# EAGLE board MotorShield (EAGLE 9.2.2)
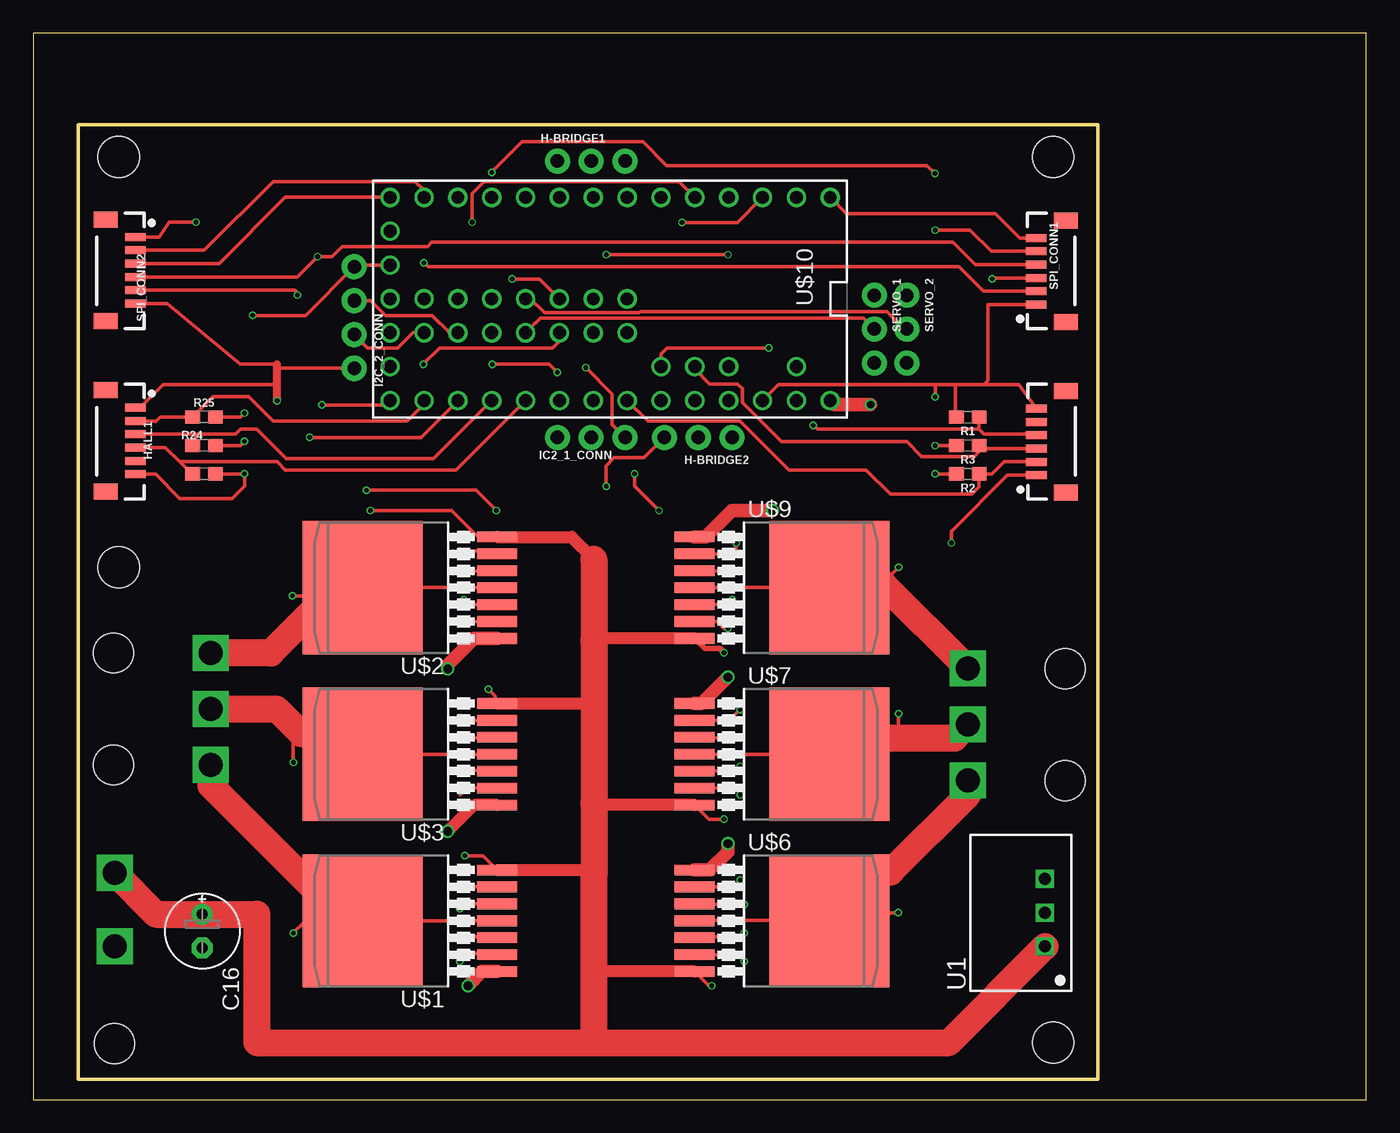
[diagram p0: board, top side]
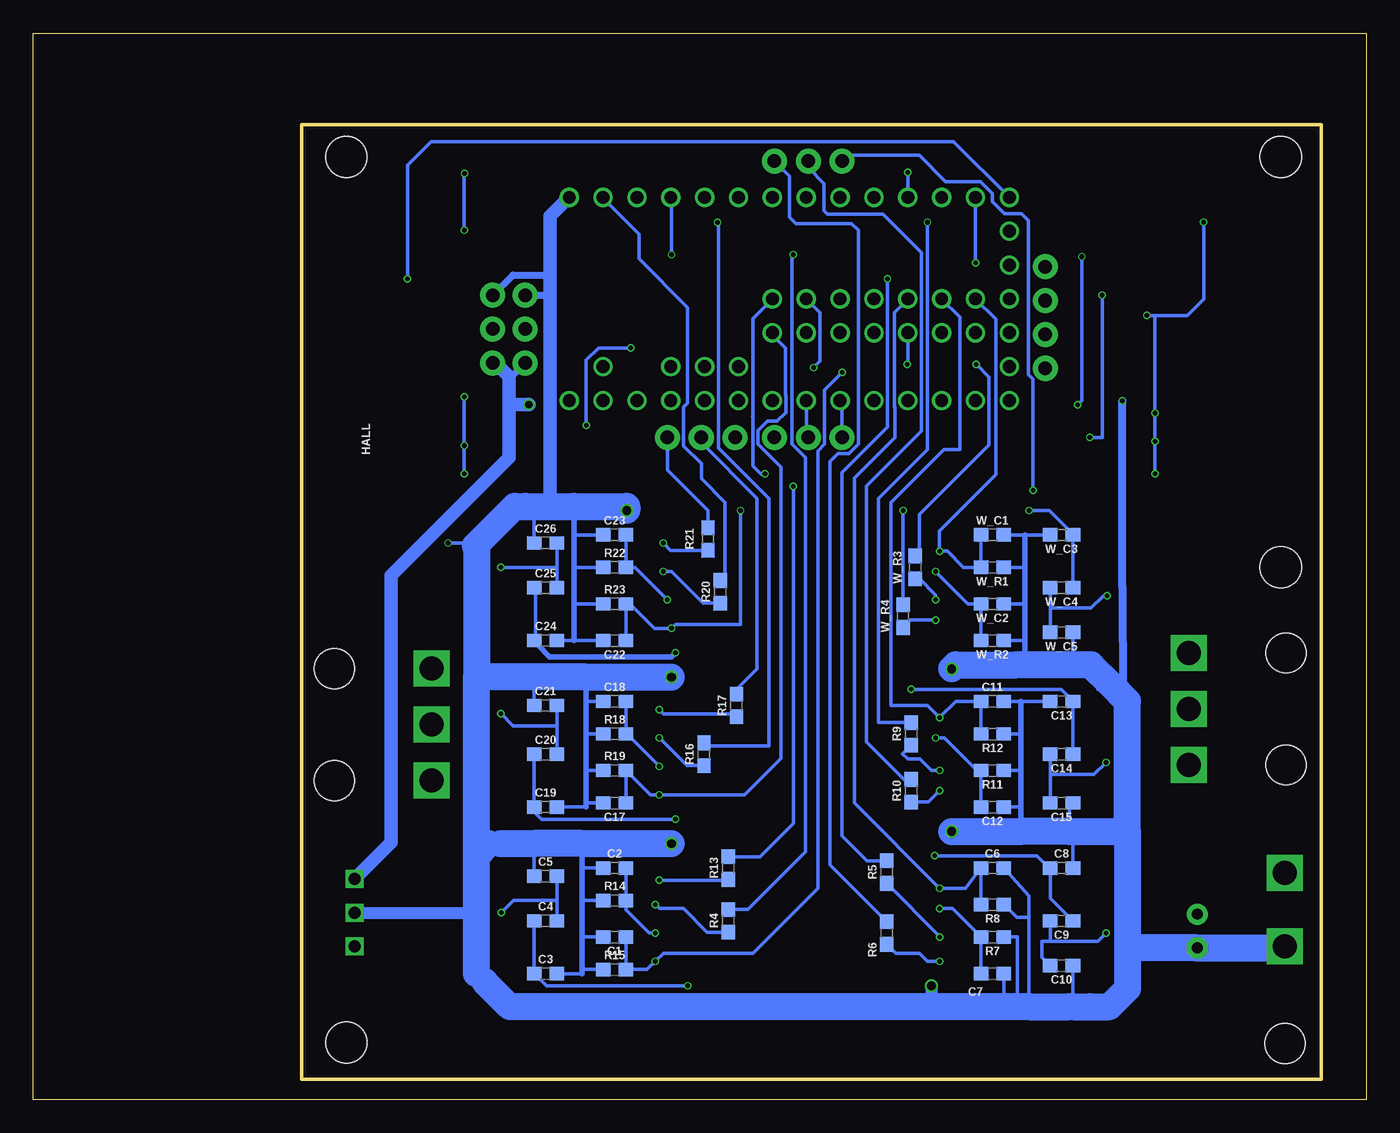
[diagram p1: board, bottom side, seen from below]

Size 100 x 80 mm. Coordinates in mm from the lower left corner, seen from the top.
Outline: 0,0 100,0 100,80 0,80 0,0
Outline: 3.35,1.52 79.86,1.52 79.86,73.15 3.35,73.15 3.35,1.52
Copper layers (1*16): Top 0.018mm / dielectric 1.55mm / Bottom 0.018mm
Design rules "Multi-CB_2L_100æm-Tracks_OL35æm": minimum track width 0.1mm, minimum drill 0.2mm, track to track 0.1mm, track to pad 0.1mm, pad to pad 0.1mm, via to via 0.1mm, smd to smd 0mil, copper to edge 0.2mm, drill to drill 0.2mm, minimum pad ring 0.125mm, minimum via ring 0.1mm, stop-mask expansion 2mil, vias tented up to drill 0.45mm, thermal gap 0.2mm
Holes 3.1 mm at 6.4,70.71 76.5,70.71 76.5,4.27 6.4,39.93

## Footprints (pad centres in the part's own frame; a part is rotated, then mirrored left to right if it is on the bottom)
0603 = smd 1.1 x 1: 1 -0.85,0; 2 0.85,0
E2,5-6E = drill 0.813 pad 1.575: + -1.27,0 | drill 0.813 pad 1.575 octagon: - 1.27,0
1X03_NO_SILK = drill 1.016 pad 1.88: 1 0,0; 2 2.54,0; 3 5.08,0
1X06-1MM = smd 0.6 x 1.55: 1 -2.54,1.27; 2 -1.54,1.27; 3 -0.54,1.27; 4 0.46,1.27; 5 1.46,1.27; 6 2.46,1.27 | smd 1.2 x 1.8: P$1 -3.84,-0.955; P$2 3.76,-0.955
1X04_NO_SILK = drill 1.016 pad 1.88: 1 0,0; 2 2.54,0; 3 5.08,0; 4 7.62,0
TSR-1 = drill 0.9 square: 1 -2.54,0; 2 0,0; 3 2.54,0
P-TO263-7-1 = smd 0.8 x 3: 1 -3.81,-9.207; 2 -2.54,-9.207; 3 -1.27,-9.207; 4 0,-9.207; 5 1.27,-9.207; 6 2.54,-9.207; 7 3.81,-9.207 | smd 10 x 9: 8 0,0.895
5569-003 = drill 1.8 square: U -4.2,3.65; V 0,3.65; W 4.2,3.65 | hole 3: 4.2,-3.65; -4.2,-3.65
5569-002 = drill 1.8 square: GND 0,0; VCC 0,5.5 | hole 3: 0,-7.3
TEENSY_3.0-3.2_ALL_PINS_&_PADS = drill 0.965: 0 -7.62,13.97; 1 -7.62,11.43; 2 -7.62,8.89; 3 -7.62,6.35; 3.3V 7.62,11.43; 3.3V1 -2.54,-16.51; 3.3V2 2.54,-1.27; 4 -7.62,3.81; 5 -7.62,1.27; 6 -7.62,-1.27; 7 -7.62,-3.81; 8 -7.62,-6.35; 9 -7.62,-8.89; 10 -7.62,-11.43; 11 -7.62,-13.97; 12 -7.62,-16.51; 13 7.62,-16.51; 14/A0 7.62,-13.97; 15/A1 7.62,-11.43; 16/A2 7.62,-8.89; 17/A3 7.62,-6.35; 18/A4 7.62,-3.81; 19/A5 7.62,-1.27; 20/A6 7.62,1.27; 21/A7 7.62,3.81; 22/A8 7.62,6.35; 23/A9 7.62,8.89; 24 0,-3.81; 25 0,-6.35; 26 0,-8.89; 27 0,-11.43; 28 0,-13.97; 29 2.54,-13.97; 30 2.54,-11.43; 31 2.54,-8.89; 32 2.54,-6.35; 33 2.54,-3.81; A10 5.08,6.35; A11 5.08,3.81; A12 0,1.27; A13 2.54,1.27; AGND 7.62,13.97; AREF 5.08,8.89; GND -7.62,16.51; GND1 0,-16.51; GND2 0,-1.27; PGM 2.54,-16.51; RESET/DAC 5.08,-16.51; VBAT -5.08,-16.51; VIN 7.62,16.51; VUSB 5.08,13.97

## Placement (x,y rotation side)
C1  0.1uF  [0603]  56.39,12.19 180 bottom
C2  1nF  [0603]  56.39,17.37 0 bottom
C3  0.1uF  [0603]  61.57,9.45 0 bottom
C4  0.22uF  [0603]  61.57,13.41 0 bottom
C5  0.22uF  [0603]  61.57,16.76 0 bottom
C6  0.1uF  [0603]  28.04,17.37 0 bottom
C7  1nF  [0603]  28.04,9.45 180 bottom
C8  0.1uF  [0603]  22.86,17.37 0 bottom
C9  0.22uF  [0603]  22.86,13.41 180 bottom
C10  0.22uF  [0603]  22.86,10.06 180 bottom
C11  0.1uF  [0603]  28.04,29.87 0 bottom
C12  1nF  [0603]  28.04,21.95 180 bottom
C13  0.1uF  [0603]  22.86,29.87 180 bottom
C14  0.22uF  [0603]  22.86,25.91 180 bottom
C15  0.22uF  [0603]  22.86,22.25 180 bottom
C16  [E2,5-6E]  12.67,12.64 270 top
C17  0.1uF  [0603]  56.39,22.25 180 bottom
C18  1nF  [0603]  56.39,29.87 0 bottom
C19  0.1uF  [0603]  61.57,21.95 0 bottom
C20  0.22uF  [0603]  61.57,25.91 0 bottom
C21  0.22uF  [0603]  61.57,29.57 0 bottom
C22  0.1uF  [0603]  56.39,34.44 180 bottom
C23  1nF  [0603]  56.39,42.37 0 bottom
C24  0.1uF  [0603]  61.57,34.44 0 bottom
C25  0.22uF  [0603]  61.57,38.4 0 bottom
C26  0.22uF  [0603]  61.57,41.76 0 bottom
H-BRIDGE1  PWM  [1X03_NO_SILK]  39.32,70.41 0 top
H-BRIDGE2  PWM  [1X03_NO_SILK]  52.43,49.68 180 top
HALL  [1X06-1MM]  76.53,49.38 90 top
HALL1  [1X06-1MM]  6.4,49.38 270 top
I2C_2_CONN  IMU_SENS  [1X04_NO_SILK]  24.08,54.86 90 top
IC2_1_CONN  INTEL_BRD  [1X03_NO_SILK]  39.32,49.68 0 top
R1  10k  [0603]  70.1,51.21 180 top
R2  10k  [0603]  70.1,46.94 180 top
R3  10k  [0603]  70.1,49.07 180 top
R4  10k  [0603]  47.85,13.41 90 bottom
R5  10k  [0603]  35.97,17.07 90 bottom
R6  10k  [0603]  35.97,12.5 90 bottom
R7  47k  [0603]  28.04,12.19 180 bottom
R8  4.7k  [0603]  28.04,14.63 180 bottom
R9  10k  [0603]  34.14,27.43 90 bottom
R10  10k  [0603]  34.14,23.16 90 bottom
R11  47k  [0603]  28.04,24.69 180 bottom
R12  4.7k  [0603]  28.04,27.43 180 bottom
R13  10k  [0603]  47.85,17.37 90 bottom
R14  47k  [0603]  56.39,14.94 0 bottom
R15  4.7k  [0603]  56.39,9.75 0 bottom
R16  10k  [0603]  49.68,25.91 90 bottom
R17  10k  [0603]  47.24,29.57 90 bottom
R18  47k  [0603]  56.39,27.43 0 bottom
R19  4.7k  [0603]  56.39,24.69 0 bottom
R20  10k  [0603]  48.46,38.1 90 bottom
R21  10k  [0603]  49.38,42.06 90 bottom
R22  47k  [0603]  56.39,39.93 0 bottom
R23  4.7k  [0603]  56.39,37.19 0 bottom
R24  10k  [0603]  12.8,46.94 0 top
R25  10k  [0603]  12.8,51.21 0 top
R26  10k  [0603]  12.8,49.07 0 top
SERVO_1  [1X03_NO_SILK]  63.09,60.35 270 top
SERVO_2  [1X03_NO_SILK]  65.53,60.35 270 top
SPI_CONN1  ENCODER  [1X06-1MM]  76.5,62.18 90 top
SPI_CONN2  ENCODER  [1X06-1MM]  6.4,62.18 270 top
U1  TSR_1-2450  [TSR-1]  75.9,14.02 90 top
U$1  [P-TO263-7-1]  25.6,13.41 90 top
U$2  [P-TO263-7-1]  25.6,38.4 90 top
U$3  [P-TO263-7-1]  25.6,25.91 90 top
U$4  [5569-003]  9.67,29.3 270 top
U$5  5569-002  [5569-002]  6.1,11.5 0 bottom
U$6  [P-TO263-7-1]  58.83,13.41 270 top
U$7  [P-TO263-7-1]  58.83,25.91 270 top
U$8  [5569-003]  73.76,28.13 90 top
U$9  [P-TO263-7-1]  58.83,38.4 270 top
U$10  TEENSY_3.1-3.2_ALL_PINS&PADS  [TEENSY_3.0-3.2_ALL_PINS_&_PADS]  43.28,60.07 270 top
W_C1  0.1uF  [0603]  28.04,42.37 0 bottom
W_C2  1nF  [0603]  28.04,37.19 180 bottom
W_C3  0.1uF  [0603]  22.86,42.37 180 bottom
W_C4  0.22uF  [0603]  22.86,38.4 180 bottom
W_C5  0.22uF  [0603]  22.86,35.05 180 bottom
W_R1  4.7k  [0603]  28.04,39.93 180 bottom
W_R2  47k  [0603]  28.04,34.44 180 bottom
W_R3  10k  [0603]  33.83,39.93 90 bottom
W_R4  10k  [0603]  34.75,36.27 90 bottom

## Library data of the parts
C1 C3 C6 C8 C11 C13 C17 C19 C22 C24 W_C1 W_C3 = SparkFun-Capacitors; PROD_ID: CAP-08604
C2 C7 C12 C18 C23 W_C2 = SparkFun-Capacitors; PROD_ID: CAP-07886
C4 C5 C9 C10 C14 C15 C20 C21 C25 C26 W_C4 W_C5 = SparkFun-Capacitors; PROD_ID: CAP-07822
C16 = rcl; SPICEPREFIX: C
H-BRIDGE1 H-BRIDGE2 IC2_1_CONN SERVO_1 SERVO_2 = SparkFun-Connectors
HALL HALL1 SPI_CONN1 SPI_CONN2 = SparkFun-Connectors; PROD_ID: CONN-08249; SF_ID: GPS-00579
I2C_2_CONN = SparkFun-Connectors; PROD_ID: CONN-09696
R1-R6 R9 R10 R13 R16 R17 R20 R21 R24-R26 W_R3 W_R4 = SparkFun-Resistors; PROD_ID: RES-00824
R7 R11 R14 R18 R22 W_R2 = SparkFun-Resistors; PROD_ID: RES-07871
R8 R12 R15 R19 R23 W_R1 = SparkFun-Resistors; PROD_ID: RES-07857
U1 = _traco_tsr-1
U$1-U$3 U$6 U$7 U$9 = ITX007T
U$4 U$8 = 5569-03
U$5 = 5569-02
U$10 = Teensy_3_and_LC_Series_Boards_v1.4

## Nets
3.3V: HALL1.6 HALL.6 I2C_2_CONN.4 R1.2 R2.2 R3.2 R24.2 R25.2 R26.2 SPI_CONN1.1 SPI_CONN2.1 U$10.3.3V U$10.3.3V1 U$10.3.3V2
AGND: U$10.AGND
AREF: U$10.AREF
CS1: SPI_CONN1.5 U$10.9
CS2: SPI_CONN2.5 U$10.15/A1
GND: C1.2 C2.1 C3.2 C5.1 C6.2 C7.1 C8.2 C10.1 C11.2 C12.1 C13.2 C15.1 C16.- C17.2 C18.1 C19.2 C21.1 C22.2 C23.1 C24.2 C26.1 HALL1.1 HALL.1 I2C_2_CONN.1 IC2_1_CONN.3 R7.1 R8.1 R11.1 R12.1 R14.1 R15.1 R18.1 R19.1 R22.1 R23.1 SERVO_1.1 SERVO_2.1 SPI_CONN1.6 SPI_CONN2.6 U1.2 U$1.1 U$2.1 U$3.1 U$5.GND U$6.1 U$7.1 U$9.1 U$10.GND U$10.GND1 U$10.GND2 W_C1.2 W_C2.1 W_C3.2 W_C5.1 W_R1.1 W_R2.1
HALL_U: HALL.2 R2.1 U$10.20/A6
HALL_U2: HALL1.2 R25.1 U$10.14/A0
HALL_V: HALL.3 R3.1 U$10.A10
HALL_V2: HALL1.3 R26.1 U$10.16/A2
HALL_W: HALL.4 R1.1 U$10.A11
HALL_W2: HALL1.4 R24.1 U$10.17/A3
IN_U: H-BRIDGE1.3 R6.2
IN_U2: H-BRIDGE2.3 R13.2
IN_U2_EX: U$10.21/A7
IN_U_EX: U$10.5
IN_V: H-BRIDGE1.2 R10.2
IN_V2: H-BRIDGE2.2 R17.2
IN_V2_EX: U$10.22/A8
IN_V_EX: U$10.6
IN_W: H-BRIDGE1.1 W_R4.2
IN_W2: H-BRIDGE2.1 R21.2
IN_W2_EX: U$10.23/A9
IN_W_EX: U$10.10
INH_U: R5.2 U$10.24
INH_U2: R4.2 U$10.2
INH_V: R9.2 U$10.3
INH_V2: R16.2 U$10.1
INH_W: U$10.33 W_R3.2
INH_W2: R20.2 U$10.0
IS_U: C6.1 R8.2 U$1.6 U$10.26
IS_U2: C1.1 R15.2 U$6.6 U$10.31
IS_V: C11.1 R12.2 U$3.6 U$10.27
IS_V2: C17.1 R19.2 U$7.6 U$10.A13
IS_W: U$2.6 U$10.28 W_C1.1 W_R1.2
IS_W2: C22.1 R23.2 U$9.6 U$10.A12
MISO: SPI_CONN1.3 SPI_CONN2.3 U$10.12
MOSI: SPI_CONN1.2 SPI_CONN2.2 U$10.11
N$1: U$2.3 W_R3.1
N$2: C12.2 R11.2 U$3.5
N$3: U$2.5 W_C2.2 W_R2.2
N$10: C7.2 R7.2 U$1.5
N$11: R5.1 U$1.3
N$14: R6.1 U$1.2
N$17: R4.1 U$6.3
N$18: R9.1 U$3.3
N$19: R13.1 U$6.2
N$20: U$2.2 W_R4.1
N$23: C2.2 R14.2 U$6.5
N$24: R10.1 U$3.2
N$26: R16.1 U$7.3
N$27: R17.1 U$7.2
N$29: C18.2 R18.2 U$7.5
N$30: R20.1 U$9.3
N$31: R21.1 U$9.2
N$33: C23.2 R22.2 U$9.5
S_PWM_1: SERVO_1.2 U$10.32
S_PWM_2: SERVO_2.2 U$10.25
SCK: SPI_CONN1.4 SPI_CONN2.4 U$10.13
SCL0: IC2_1_CONN.2 U$10.19/A5
SCL1: I2C_2_CONN.2 U$10.29
SDA0: IC2_1_CONN.1 U$10.18/A4
SDA1: I2C_2_CONN.3 U$10.30
U: C9.2 C10.2 U$1.4 U$1.8 U$4.W
U2: C4.2 C5.2 U$6.4 U$6.8 U$8.U
V: C14.2 C15.2 U$3.4 U$3.8 U$4.V
V2: C20.2 C21.2 U$7.4 U$7.8 U$8.V
VBAT: U$10.VBAT
VCC: SERVO_1.3 SERVO_2.3 U1.3 U$10.VIN
VI: C3.1 C4.1 C8.1 C9.1 C13.1 C14.1 C16.+ C19.1 C20.1 C24.1 C25.1 U1.1 U$1.7 U$2.7 U$3.7 U$5.VCC U$6.7 U$7.7 U$9.7 W_C3.1 W_C4.1
VUSB: U$10.VUSB
W: U$2.4 U$2.8 U$4.U W_C4.2 W_C5.2
W2: C25.2 C26.2 U$8.W U$9.4 U$9.8

## Tracks (layer width: path | path; a pad name or v marks a point on that pad's centre or on a via)
3.3V  (via drill 0.35)
  Top 0.254: U$10.3.3V1 24.21,62.61 I2C_2_CONN.4 20.42,58.83 v16.46,58.83 | R3.2 v67.67,49.07 | R2.2 v67.67,46.94 | HALL.6 73.96,53.65 71.32,53.65 | 69.19,53.65 71.32,53.65 | R1.2 69.19,51.27 69.19,53.65 | 67.67,53.65 55.91,53.65 U$10.3.3V | 67.67,53.65 67.79,53.65 69.19,53.65 | v15.85,51.51 15.54,51.21 R25.2 | R26.2 15.54,49.07 v15.85,49.38 | v12.19,65.84 10.2,65.84 9.43,64.72 SPI_CONN2.1 | SPI_CONN1.1 71.63,59.64 71.63,53.95 71.32,53.65 | R24.2 v15.85,46.94 15.85,46.02 14.94,45.11 10.97,45.11 9.17,46.92 HALL1.6 | v67.67,52.73 67.67,53.65
  Bottom 0.254: v67.67,46.94 v67.67,49.07 v67.67,52.73 | v12.19,65.84 12.19,60.05 13.41,58.83 v16.46,58.83 15.85,58.83 v15.85,51.51 v15.85,49.38 v15.85,46.94
CS1  (via drill 0.35)
  Top 0.254: SPI_CONN1.5 71.87,63.64 70.28,65.23 v67.67,65.23 | v34.39,69.57 36.68,71.86 45.74,71.86 47.52,70.08 67.06,70.08 v67.64,69.49
  Bottom 0.254: U$10.9 v34.39,69.57 | v67.64,69.49 67.67,69.47 v67.67,65.23
CS2  (via drill 0.35)
  Top 0.254: U$10.15/A1 29.08,49.68 v20.73,49.68 | v19.81,60.35 19.72,60.64 19.61,60.72 SPI_CONN2.5
  Bottom 0.254: v20.73,49.68 19.81,49.68 v19.81,60.35
GND  (via drill 0.35, 0.65)
  Top 0.254: v41.45,54.91 43.43,52.93 43.43,50.65 IC2_1_CONN.3 | HALL.1 73.1,46.84 68.91,42.65 68.89,42.67 v68.89,41.76 | SPI_CONN2.6 10.05,59.72 15.51,55.17 18.29,55.17 | 18.29,53.65 9.75,53.65 8.03,51.92 HALL1.1 | I2C_2_CONN.1 18.29,54.86 | SPI_CONN1.6 74.02,64.64 72.19,66.47 61.02,66.47 U$10.GND
  Top 0.61: v18.29,52.43 18.29,53.65 18.29,54.86 18.29,55.17
  Top 0.889: U$3.1 33.07,22.1 v31.09,20.12
  Top 1.016: U$2.1 33.07,34.59 31.09,32.61 v31.09,32.31 | U$9.1 50.44,42.22 52.43,44.2 v55.47,44.2 | U$1.1 33.68,9.6 v32.61,8.53 | U$6.1 50.75,17.22 52.12,18.59 v52.12,19.2 | U$7.1 50.14,29.72 v52.12,31.7
  Bottom 0.254: C15.1 arc90 22.25,22.01 22.25,20.12 22,19.86 22,19.61 22.01,19.59 C8.2 | C13.2 25.91,29.87 C11.2 | R12.1 25.91,27.43 | R11.1 25.91,24.69 | C12.1 25.91,21.95 | R8.1 26.21,13.65 25.41,13.65 25.3,13.54 | C6.2 25.3,15.3 25.3,13.54 | W_C1.2 25.6,42.37 W_C3.2 | W_R1.1 25.6,39.93 | W_C2.1 25.6,37.19 | W_R2.1 25.6,34.44 | W_C5.1 22.01,32.61 | C2.1 58.83,17.37 | R14.1 58.83,14.94 | R15.1 58.83,9.75 | 58.83,9.45 C3.2 | R19.1 58.52,24.69 | R18.1 58.52,27.43 | C18.1 58.52,29.87 | 63.09,44.5 62.42,43.83 C26.1 | R23.1 59.44,37.19 | R22.1 59.44,39.93 | C23.1 59.44,42.37 | C22.2 59.44,34.44 C24.2 | 26.52,6.96 26.47,7.01 26.36,7.01 26.19,7.19 26.19,12.22 26.21,12.19 R7.1 | 25.3,13.54 25.3,6.96 | U$10.GND2 41,59.04 41,55.41 41.45,54.95 v41.45,54.91 | C21.1 62.42,31.7 | C5.1 62.42,19.2 | v68.89,41.76 67.06,41.76 66.84,41.54 66.75,41.45 | C17.2 58.52,22.25 | 58.52,21.95 C19.2 | C1.2 58.8,12.19 58.83,12.17 | C7.1 27.19,7 27.23,6.96 | 61.24,61.87 61.21,61.85 61.21,61.01 | 65.84,19.2 64.92,19.2 | C10.1 22.01,6.96 | 22.25,6.96 20.73,6.96 | 19.51,31.48 19.12,31.09 19.43,30.79 20.12,30.79 19.51,31.39 19.51,31.48
  Bottom 0.406: 25.91,29.87 25.91,27.43 25.91,24.69 25.91,21.95 25.91,20.12 | 25.6,42.37 25.6,39.93 25.6,37.19 25.6,34.44 25.6,32.92 25.91,32.61 26.21,32.61 | 58.83,9.45 58.83,9.75 58.83,12.17 58.83,14.94 58.83,17.37 58.83,19.2 | 58.52,31.7 58.52,29.87 58.52,27.43 58.52,24.69 58.52,22.25 58.52,21.95 | 59.44,44.5 59.44,42.37 59.44,39.93 59.44,37.19 59.44,34.44
  Bottom 0.508: SERVO_1.1 61.24,60.35 | SERVO_2.1 64.01,61.87 61.24,61.87
  Bottom 0.61: 18.24,30.21 18.29,38.4 18.29,38.41 v18.29,52.43
  Bottom 0.889: U1.2 66.75,14.02 | 66.75,9.45 66.14,8.84 | v32.61,8.53 32.61,6.96 | 18.86,30.83 20.64,32.61
  Bottom 1.016: U$10.GND 61.21,66.27 61.21,61.01 | 61.24,61.87 61.24,60.35 61.24,44.5
  Bottom 2.032: 17.9,20.12 17.9,29.87 18.24,30.21 18.86,30.83 19.12,31.09 20.64,32.61 22.01,32.61 25.91,32.61 | v55.47,44.2 55.47,44.5 59.44,44.5 61.24,44.5 63.09,44.5 63.88,44.5 66.84,41.54 | 17.9,20.12 22.25,20.12 25.91,20.12 v31.09,20.12 | v52.12,19.2 58.83,19.2 62.42,19.2 64.92,19.2 | v52.12,31.7 58.52,31.7 62.42,31.7 66.75,31.7 | U$5.GND 6.22,11.37 C16.- 17.9,11.37 | 22.25,6.96 25.3,6.96 26.52,6.96 27.23,6.96 32.61,6.96 64.26,6.96 66.14,8.84 | 17.9,20.12 17.9,11.37 | 17.9,11.37 17.9,8.31 19.25,6.96 20.73,6.96 22.01,6.96 | v31.09,32.31 30.79,32.61 26.21,32.61 | 66.75,18.29 65.84,19.2 | 66.75,9.45 66.75,14.02 66.75,18.29 | 66.75,18.29 66.75,31.7 | 66.75,41.45 66.75,31.7
HALL_U
  Top 0.254: HALL.2 74.77,47.85 72.85,47.85 71.93,46.94 R2.1 70.95,45.96 70.41,45.41 64.31,45.41 62.48,47.24 56.69,47.24 53.03,50.9 46.1,50.9 U$10.20/A6
HALL_U2
  Top 0.254: HALL1.2 9.13,50.92 9.18,50.87 9.51,51.21 R25.1 13.48,52.73 16.15,52.73 17.98,50.9 28.04,50.9 29.31,52.17 U$10.14/A0
HALL_V
  Top 0.254: HALL.3 75.25,48.83 71.2,48.83 R3.1 70.95,48.6 70.61,48.26 66.65,48.26 65.53,49.38 56.12,49.38 53.19,52.31 53.19,53.35 52.85,53.7 50.72,53.7 49.63,54.79 U$10.A10
HALL_V2
  Top 0.254: HALL1.3 12.19,49.92 | U$10.16/A2 30.03,48.09 18.97,48.09 16.76,50.29 15.54,50.29 15.17,49.92 12.19,49.92 | 12.19,49.92 12.19,49.31 R26.1
HALL_W  (via drill 0.35)
  Top 0.254: HALL.4 75.23,49.94 71.31,49.94 70.95,50.29 | U$10.A11 47.09,55.93 47.55,56.39 v55.17,56.39 | 70.95,50.29 58.83,50.29 v58.52,50.6 | R1.1 70.95,50.29
  Bottom 0.254: v58.52,50.6 58.52,55.47 57.61,56.39 v55.17,56.39
HALL_W2
  Top 0.152: 11.92,46.91 R24.1
  Top 0.254: U$10.17/A3 31.73,47.24 18.96,47.24 18.93,47.21 18.29,47.85 10.97,47.85 | 11.92,46.91 10.97,47.85 | 10.97,47.85 9.91,48.92 HALL1.4
IN_U
  Bottom 0.254: R6.2 40.23,17.61 40.23,47.85 39.62,48.46 38.81,48.46 38.1,49.18 38.1,65.23 38.61,65.73 42.8,65.73 43.26,66.19 43.26,69.27 H-BRIDGE1.3
IN_U2  (via drill 0.35)
  Top 0.254: v42.98,46.02 42.98,47.55 43.59,48.16 45.82,48.16 H-BRIDGE2.3
  Bottom 0.254: R13.2 45.48,18.22 42.98,20.73 v42.98,46.02
IN_V
  Bottom 0.254: R10.2 34.68,24.02 37.49,26.82 37.49,46.02 33.38,50.14 33.38,63.55 36.27,66.45 40.41,66.45 40.66,66.7 40.66,68.73 41.86,69.93 H-BRIDGE1.2
IN_V2
  Bottom 0.254: R17.2 47.24,30.79 45.72,32.31 45.72,45.11 49.89,49.28 H-BRIDGE2.2
IN_W  (via drill 0.35)
  Top 0.254: v34.75,44.2 33.22,45.72 v24.99,45.72
  Bottom 0.254: W_R4.2 v34.75,44.2 | v24.99,45.72 24.99,54.05 25.35,54.41 25.35,65.94 25.88,66.47 27.15,66.47 28.04,67.36 28.04,67.97 28.96,68.89 31.57,68.89 33.53,70.84 38.89,70.84 H-BRIDGE1.1
IN_W2
  Bottom 0.254: R21.2 49.38,44.2 52.43,47.24 H-BRIDGE2.1
INH_U  (via drill 0.35)
  Top 0.254: v35.92,61.57 37.97,61.57 U$10.24
  Bottom 0.254: R5.2 37.44,17.92 39.32,19.8 39.32,47.04 35.92,50.45 v35.92,61.57
INH_U2  (via drill 0.35)
  Top 0.254: v52.12,63.4 v42.98,63.4
  Bottom 0.254: R4.2 46.39,14.26 42.06,18.59 42.06,48.16 43.08,49.18 43.08,63.3 v42.98,63.4 | v52.12,63.4 52.12,67.64 U$10.2
INH_V  (via drill 0.35)
  Top 0.254: U$10.3 48.44,68.89 33.83,68.89 32.92,67.97 v32.92,65.84
  Bottom 0.254: R9.2 36.58,28.28 36.58,45.11 32.92,48.77 v32.92,65.84
INH_V2  (via drill 0.35)
  Top 0.254: v48.67,65.81 52.83,65.81 U$10.1
  Bottom 0.254: R16.2 49.47,26.55 44.81,26.55 44.81,45.09 48.59,48.87 48.59,65.73 v48.67,65.81
INH_W  (via drill 0.35)
  Top 0.254: U$10.33 39.47,56.9 38.96,56.39 30.48,56.39 v29.26,55.17
  Bottom 0.254: W_R3.2 33.53,41.08 33.53,43.89 28.3,49.12 28.3,54.2 v29.26,55.17
INH_W2
  Bottom 0.254: R20.2 48.11,39.31 48.11,44.81 49.89,46.58 49.89,47.72 51.21,49.04 51.21,51.95 50.9,52.26 50.9,59.44 54.56,63.09 54.56,64.92 57.25,67.61 U$10.0
IS_U  (via drill 0.35)
  Top 0.254: U$1.6 32.11,15.95 v32,15.85
  Bottom 0.254: R8.2 C6.1 30.08,15.85 v32,15.85 38.41,22.25 38.41,46.63 35.36,49.68 35.36,51.95 35.41,52.01 35.41,59.05 U$10.26
IS_U2  (via drill 0.35)
  Top 0.254: U$6.6 52.83,10.87 v53.34,10.36 | v39.32,54.56 38.71,55.17 v34.44,55.17
  Bottom 0.254: v39.32,54.56 40.64,53.24 40.64,49.18 41.15,48.67 41.15,15.85 46.02,10.97 52.73,10.97 v53.34,10.36 53.95,9.75 R15.2 C1.1 | v34.44,55.17 34.39,55.22 U$10.31
IS_V  (via drill 0.35)
  Top 0.254: U$3.6 32.21,28.45 v32,28.65
  Bottom 0.254: R12.2 C11.1 30.79,29.87 v32,28.65 32.92,29.57 35.03,29.57 35.66,29.57 35.66,44.81 31.7,48.77 30.48,48.77 30.48,58.7 U$10.27
IS_V2  (via drill 0.35)
  Top 0.254: v53.03,22.86 53.03,23.37 U$7.6
  Bottom 0.254: C17.1 R19.2 53.71,22.86 v53.03,22.86 46.63,22.86 43.89,25.6 43.89,47.45 45.62,49.18 45.62,50.19 44.9,50.9 44.2,50.9 43.54,51.56 43.54,52.85 43.59,52.9 43.59,56.39 44.55,57.35 U$10.A13
IS_W  (via drill 0.35)
  Top 0.254: v32,41.15 34.61,41.15 U$2.6
  Bottom 0.254: W_C1.1 W_R1.2 30.21,39.93 31.43,41.15 v32,41.15 32,42.67 27.79,46.89 27.79,58.55 U$10.28
IS_W2  (via drill 0.35)
  Top 0.254: v52.12,35.36 51.82,35.36 51.31,35.87 U$9.6 | v45.11,46.94 45.11,46.02 v46.94,44.2
  Bottom 0.254: v46.94,44.2 46.94,35.66 51.82,35.66 v52.12,35.36 53.4,35.36 55.23,37.19 R23.2 C22.1 | U$10.A12 46.02,58.6 46.02,51.21 46.06,51.24 46.02,51.27 46.02,47.55 45.41,46.94 v45.11,46.94
MISO  (via drill 0.35)
  Top 0.254: U$10.12 18.91,67.69 13.94,62.72 SPI_CONN2.3 | v71.93,61.57 72,61.64 SPI_CONN1.3
  Bottom 0.254: U$10.12 30.96,71.88 70.16,71.88 71.93,70.1 v71.93,61.57
MOSI  (via drill 0.35)
  Top 0.254: SPI_CONN2.2 12.82,63.72 17.98,68.89 28.65,68.89 29.31,68.22 U$10.11 | v29.31,62.79 29.61,62.48 69.43,62.48 71.27,60.64 SPI_CONN1.2
  Bottom 0.254: U$10.11 v29.31,62.79
N$1  (via drill 0.35)
  Top 0.254: v32.31,37.49 32.66,37.13 U$2.3
  Bottom 0.254: W_R3.1 33.53,39.08 32.31,37.86 v32.31,37.49
N$2  (via drill 0.35)
  Top 0.254: v32.31,27.13 34.76,27.13 U$3.5
  Bottom 0.254: C12.2 R11.2 29.2,24.69 31.64,27.13 v32.31,27.13
N$3  (via drill 0.35)
  Top 0.254: v32.31,39.62 32.36,39.67 U$2.5
  Bottom 0.254: W_R2.2 W_C2.2 29.87,37.19 v32.31,39.62
N$10  (via drill 0.35)
  Top 0.254: v32,14.33 32.36,14.68 U$1.5
  Bottom 0.254: C7.2 R7.2 31.02,14.33 v32,14.33
N$11  (via drill 0.35)
  Top 0.254: v32,12.19 34.76,12.19 U$1.3
  Bottom 0.254: R5.1 32,12.26 v32,12.19
N$14  (via drill 0.35)
  Top 0.254: v32,10.36 32.61,10.97 34.71,10.97 U$1.2
  Bottom 0.254: v32,10.36 32.92,10.36 33.53,10.97 35.29,10.97 R6.1
N$17  (via drill 0.35)
  Top 0.254: U$6.3 49.62,14.63 v53.34,14.63
  Bottom 0.254: v53.34,14.63 53.03,14.33 51.21,14.33 49.44,12.56 R4.1
N$18  (via drill 0.35)
  Top 0.254: U$3.3 34.76,24.69 v32,24.69
  Bottom 0.254: v32,24.69 32.6,24.69 33.47,25.55 34.4,25.55 34.78,25.94 R9.1
N$19  (via drill 0.35)
  Top 0.254: v53.03,16.46 52.53,15.95 U$6.2
  Bottom 0.254: v53.03,16.46 47.92,16.46 R13.1
N$20  (via drill 0.35)
  Top 0.254: U$2.2 32.41,35.87 v32.31,35.97
  Bottom 0.254: v32.31,35.97 34.2,35.97 W_R4.1
N$23  (via drill 0.35)
  Top 0.254: U$6.5 49.67,12.19 53.03,12.19 v53.34,12.5
  Bottom 0.254: v53.34,12.5 53.8,12.5 55.54,14.24 R14.2 C2.2
N$24  (via drill 0.35)
  Top 0.254: U$3.2 32.51,23.37 32,22.86 v32,23.16
  Bottom 0.254: v32,23.16 32.85,22.32 R10.1
N$26  (via drill 0.35)
  Top 0.254: U$7.3 49.67,27.13 v53.03,27.13
  Bottom 0.254: v53.03,27.13 50.97,25.06 R16.1
N$27  (via drill 0.35)
  Top 0.254: U$7.2 52.22,28.45 v53.03,29.26
  Bottom 0.254: R17.1 47.46,28.93 52.71,28.93 v53.03,29.26
N$29  (via drill 0.35)
  Top 0.254: U$7.5 52.68,24.64 v53.03,24.99
  Bottom 0.254: C18.2 R18.2 55.47,27.43 v53.03,24.99
N$30  (via drill 0.35)
  Top 0.254: U$9.3 52.68,39.67 v52.73,39.62
  Bottom 0.254: v52.73,39.62 52.12,39.62 49.75,37.25 R20.1
N$31  (via drill 0.35)
  Top 0.254: v52.73,41.76 52.73,40.95 U$9.2
  Bottom 0.254: v52.73,41.76 52.19,41.21 R21.1
N$33  (via drill 0.35)
  Top 0.254: U$9.5 52.07,37.13 v52.43,37.49
  Bottom 0.254: C23.2 R22.2 54.86,39.93 v52.43,37.49
S_PWM_1
  Top 0.254: U$10.32 37.69,58.29 37.72,58.29 38.05,58.62 62.28,58.62 SERVO_1.2
S_PWM_2
  Top 0.254: U$10.25 37.31,60.07 38.35,59.03 45.45,59.03 45.56,59.13 64.03,59.13 65.35,57.81 SERVO_2.2
SCK  (via drill 0.35)
  Top 0.254: U$10.13 26.44,52.12 v21.64,52.12 | SPI_CONN1.4 70.66,62.64 68.99,64.31 29.87,64.31 29.57,64.01 23.16,64.01 22.4,63.24 v21.34,63.24 19.81,61.72 SPI_CONN2.4
  Bottom 0.254: v21.34,63.24 21.34,52.43 v21.64,52.12
SCL0
  Bottom 0.254: U$10.19/A5 42.01,49.84 IC2_1_CONN.2
SCL1
  Top 0.254: U$10.29 28.49,57.53 27.34,56.39 25.09,56.39 I2C_2_CONN.2
SDA0
  Bottom 0.254: U$10.18/A4 39.32,52.3 IC2_1_CONN.1
SDA1
  Top 0.254: I2C_2_CONN.3 25.3,59.94 26.42,58.83 29.92,58.83 31.22,57.53 U$10.30
U  (via drill 0.35)
  Top 0.254: U$1.4 U$1.8 24.81,13.31 24.99,13.31 | v19.51,12.5 20.32,13.31 23.57,13.31
  Top 2.032: U$4.W 13.32,23.56 23.57,13.31 24.99,13.31
  Bottom 0.254: C9.2 23.71,11.89 | C10.2 24.32,10.67 24.32,11.89 23.71,11.89 | 23.71,11.89 20.12,11.89 v19.51,12.5
U2  (via drill 0.35)
  Top 0.254: U$6.4 50.09,13.41 50.13,13.45 56.02,13.45 56.06,13.41 U$6.8 | v64.9,14.02 64.29,14.02 63.68,13.41 62.77,13.41
  Top 2.032: 62.77,13.41 U$6.8 63.38,17.07 64.31,17.07 70.11,22.87 U$8.U
  Bottom 0.254: C4.2 60.72,14.94 | 60.72,14.94 C5.2 | v64.9,14.02 63.98,14.94 60.72,14.94
V  (via drill 0.35)
  Top 0.254: 24.99,25.91 U$3.8 24.08,25.91 23.77,25.6 24.69,25.6 24.99,25.91 | U$3.4 24.99,25.91 | v19.51,25.3 19.51,26.82 20.12,27.43
  Top 2.032: U$3.8 24.71,26.19 23.47,27.43 20.12,27.43 18.24,29.3 U$4.V
  Bottom 0.254: C14.2 23.71,24.38 | 23.71,24.38 C15.2 | 23.71,24.38 20.42,24.38 v19.51,25.3
V2  (via drill 0.35)
  Top 0.254: U$7.4 U$7.8 | v64.92,28.96 64.92,27.13
  Top 2.032: U$7.8 60.94,27.13 64.92,27.13 69.11,27.13 U$8.V
  Bottom 0.254: C21.2 60.72,28.04 | 60.72,28.04 C20.2 | v64.92,28.96 64.01,28.04 60.72,28.04
VCC  (via drill 0.55)
  Top 1.016: v62.81,52.15 60.1,52.15 U$10.VIN
  Bottom 0.508: SERVO_1.3 64.11,54.25 64.31,54.25
  Bottom 1.016: U1.3 73.15,19.3 73.15,39.32 64.31,48.16 64.31,52.12 | 64.31,52.12 64.31,54.25 65.33,55.27 SERVO_2.3 | v62.81,52.15 64.29,52.15 64.31,52.12
VI  (via drill 0.35)
  Top 0.152: 34.79,29.74 U$3.7
  Top 0.254: v34.14,30.79 34.65,30.28 34.65,29.88 34.79,29.74 | v25.3,44.2 31.39,44.2 33.27,42.32 34.71,42.32 U$2.7 | U$6.7 50.69,8.53 v50.9,8.53 | U$7.7 50.69,21.03 v51.82,21.03 | U$1.7 33.74,18.29 v32.38,18.29
  Top 0.406: U$9.7 50.38,33.83 51.51,33.83 v51.82,33.53
  Top 0.889: U$2.7 40.39,42.22 42.06,40.54 | U$9.7 42.22,34.59 42.06,34.44 | U$3.7 41.91,29.72 42.06,29.87 | U$1.7 41.6,17.22 42.06,16.76 | U$7.7 42.22,22.1 42.06,22.25 | U$6.7 42.22,9.6 42.06,9.75
  Top 2.032: U$5.VCC 9.18,13.91 C16.+ 16.76,13.91 16.76,4.27 41.66,4.27 | 41.66,4.27 42.06,4.67 42.06,9.75 42.06,16.76 42.06,22.25 42.06,29.87 42.06,34.44 42.06,40.54 | U1.1 68.68,4.27 41.66,4.27
  Bottom 0.254: v34.14,30.79 22.86,30.79 22.06,29.98 C13.1 C14.1 | C9.1 23.71,15.11 C8.1 23.71,17.31 24.69,18.29 v32.38,18.29 | v25.3,44.2 23.77,44.2 22.01,42.43 W_C3.1 W_C4.1 | C20.1 C19.1 62.42,21.57 61.89,21.03 v51.82,21.03 | v50.9,8.53 61.51,8.53 C3.1 C4.1 | C25.1 62.3,38.29 62.3,34.6 C24.1
  Bottom 0.406: v51.82,33.53 52.12,33.22 61.27,33.22 62.15,34.11 C24.1
W  (via drill 0.35)
  Top 0.254: U$2.8 U$2.4 | v19.43,37.8 22.11,37.8 22.72,38.41
  Top 2.032: U$2.8 22.72,38.41 17.82,33.51 U$4.U
  Bottom 0.254: W_C4.2 23.71,36.88 | 23.71,36.88 W_C5.2 | 23.71,36.88 20.65,36.88 19.73,37.8 v19.43,37.8
W2  (via drill 0.35)
  Top 0.254: U$9.4 63.03,38.41 63.53,38.91 | v64.92,39.93 63.72,38.72
  Top 2.032: U$9.8 63.03,38.41 | 63.53,38.91 63.72,38.72 U$8.W
  Bottom 0.254: C25.2 60.72,39.93 | 60.72,39.93 C26.2 | 60.72,39.93 v64.92,39.93